# Altium PCB Copy of corePCB.PcbDoc
Units mil, origin at the board's own origin, x right, y up, seen from the top; angles counter-clockwise.
Board outline 6000 x 4000 mil, 4 copper layers (Top Layer, Layer 1, Layer 2, Bottom Layer), stack 23.756 mil thick; 90 components, 166 nets, 637 pads, 15 vias.
Unrouted connection lines stored in the file: 432.
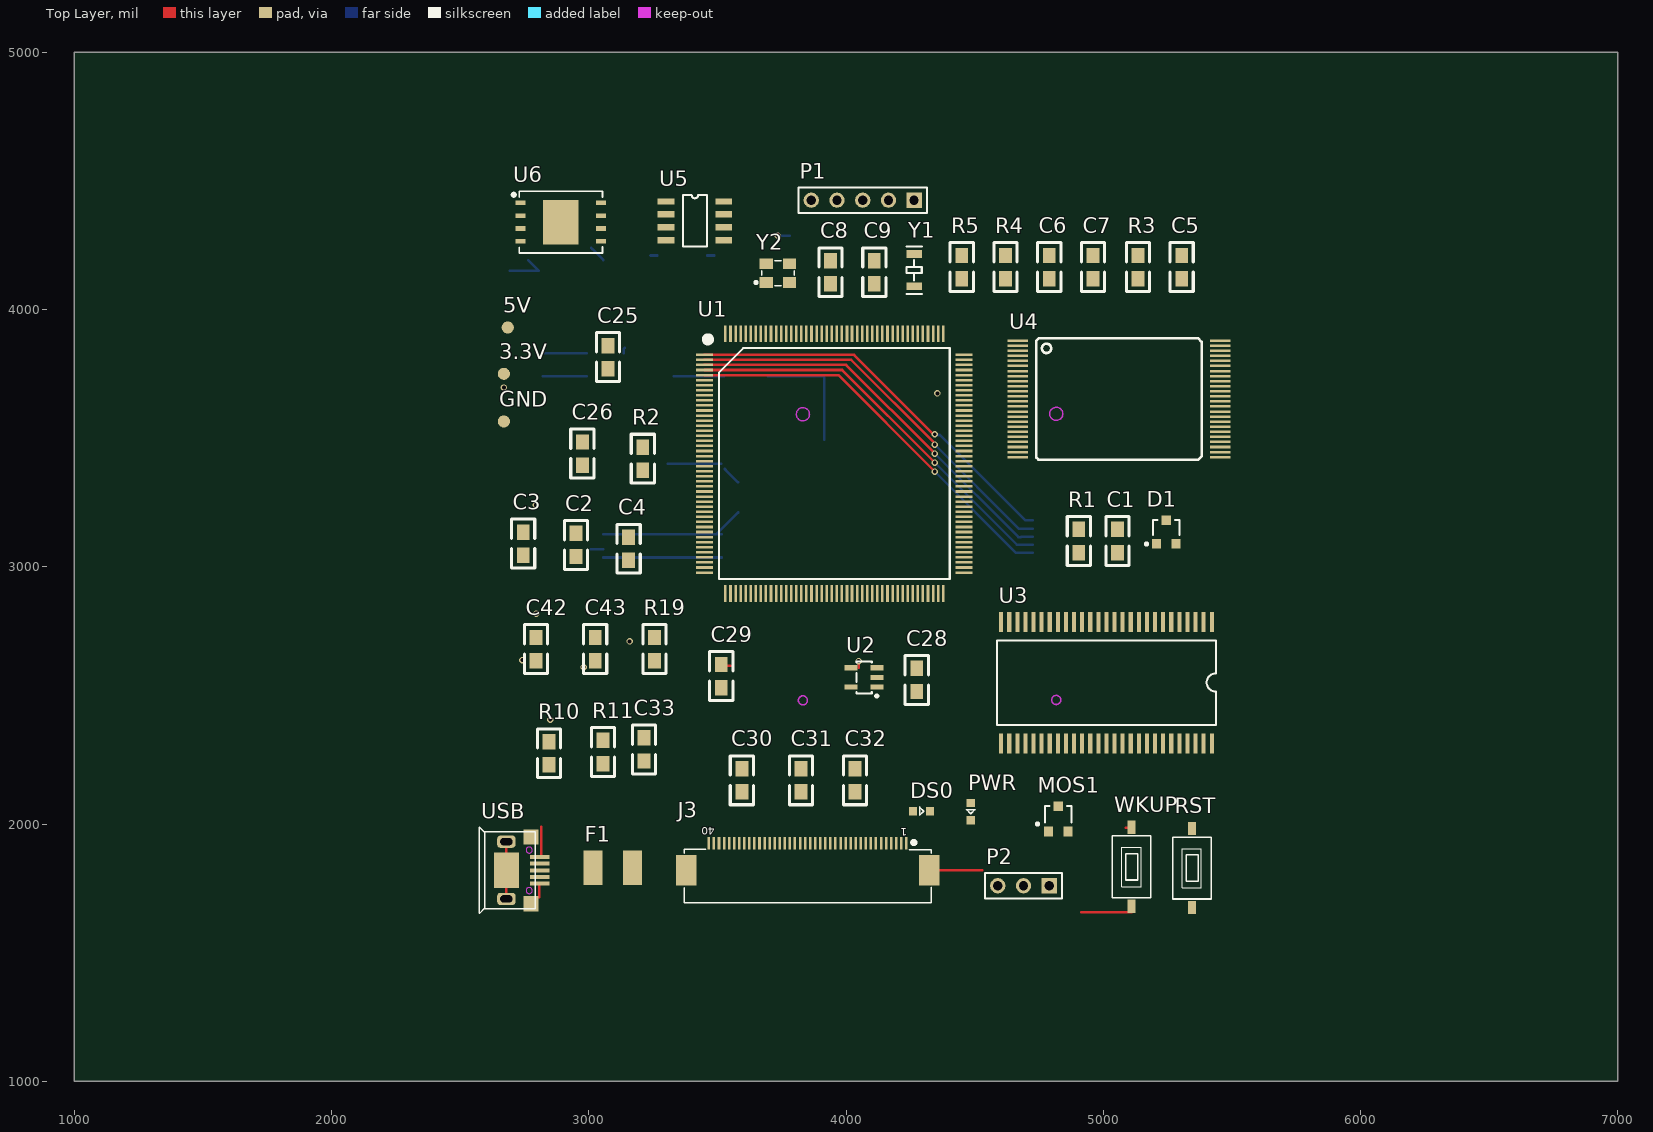
[diagram p0: Top Layer view]
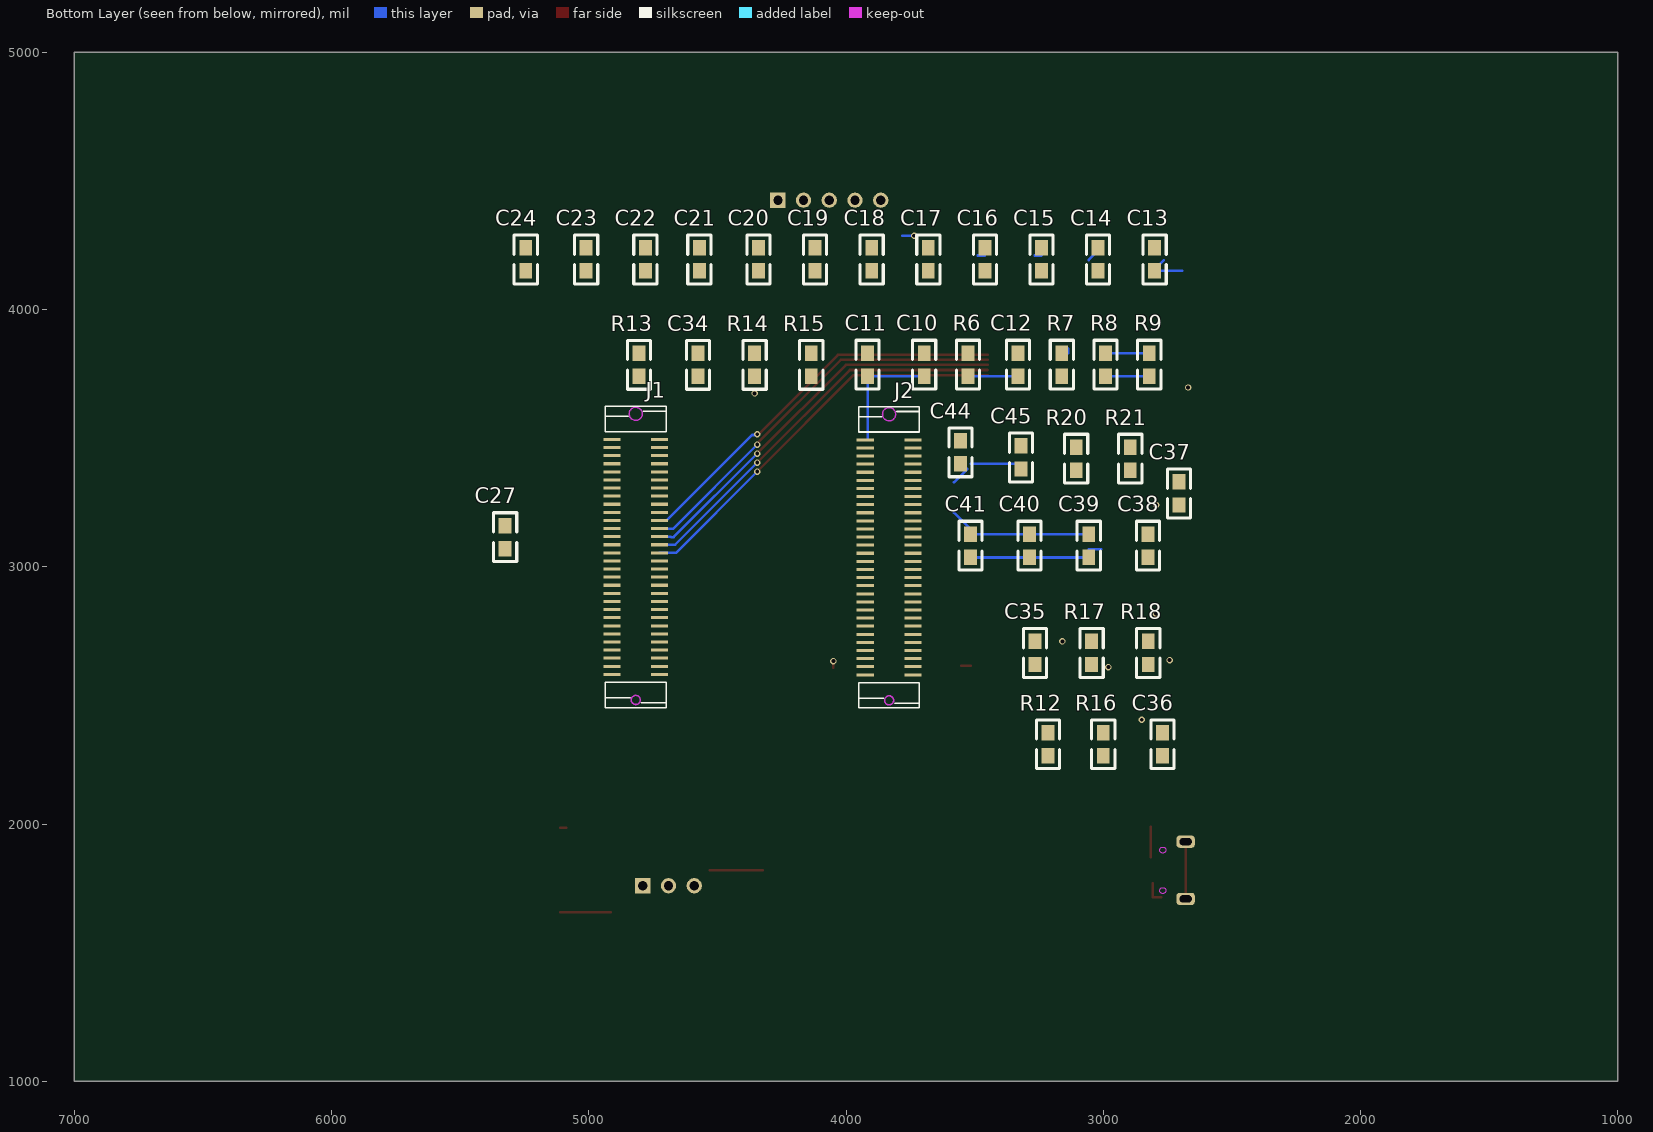
[diagram p1: Bottom Layer view, seen from below]
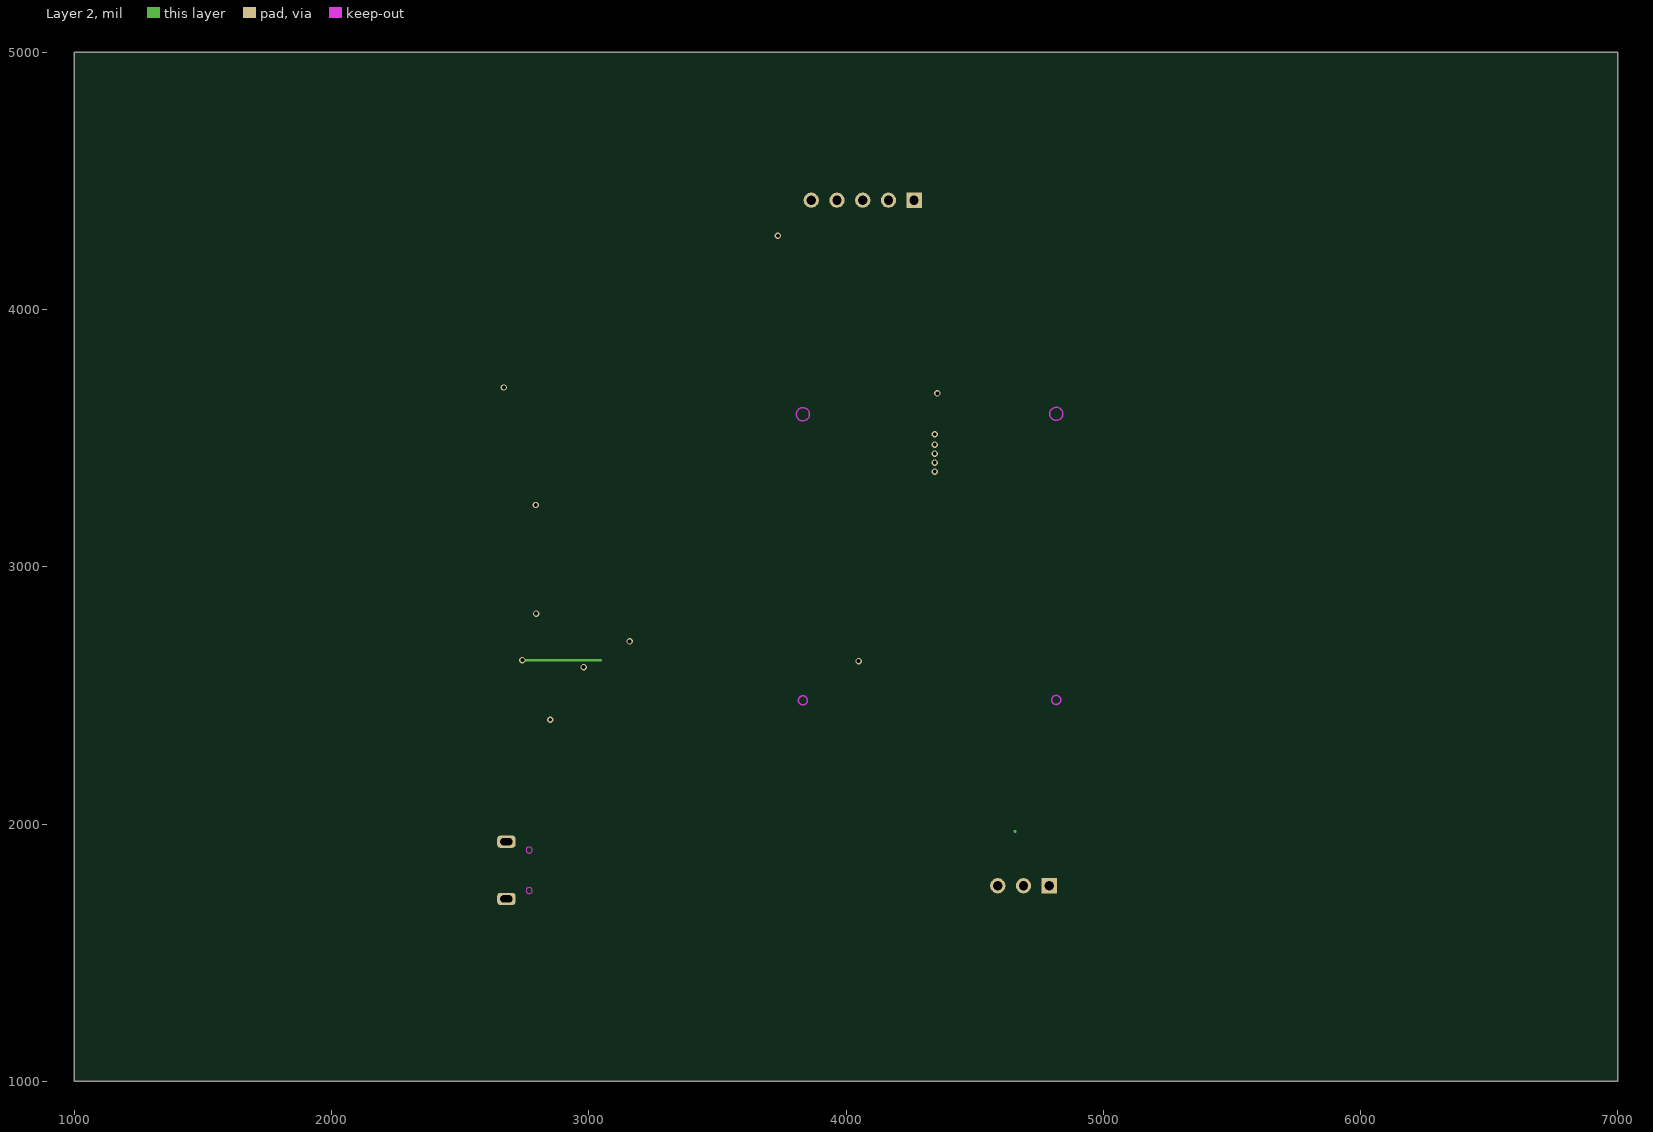
[diagram p2: Layer 2]

## Layer stack, top to bottom
Top Solder: solder mask 0.4, Solder Resist, Dk 3.5
Top Layer: signal copper 1.4
Dielectric 2: prepreg 2.8, PP-006, Dk 4.1
Layer 1: signal copper 1.3779
Dielectric 1: dielectric 12.6, FR-4, Dk 4.8
Layer 2: signal copper 1.3779
Dielectric 3: prepreg 2.8, PP-006, Dk 4.1
Bottom Layer: signal copper 1.4
Bottom Solder: solder mask 0.4, Solder Resist, Dk 3.5

## Board outline
1000,1000 7000,1000 7000,5000 1000,5000

## Design rules (kind name [scope] priority, off if disabled: settings)
Clearance [All] p1: gap=6 ignorepadtopadclearanceinfootprint=TRUE except(0: Arc-Hole Track-Hole SMDPad-Hole THPad-Hole Via-Hole Fill-Hole Poly-Hole Region-Hole Text-Hole)
ComponentClearance [All] p1 off: gap=10 collisioncheckmode=3 verticalgap=10 showdistances=FALSE
DiffPairsRouting [All] p1 off: maxlimit=10 minlimit=10 mostfreqgap=10 toplayer_minwidth=15 toplayer_maxwidth=15 toplayer_prefwidth=15 midlayer1_minwidth=15 midlayer1_maxwidth=15 midlayer1_prefwidth=15 midlayer2_minwidth=15 midlayer2_maxwidth=15 midlayer2_prefwidth=15 bottomlayer_minwidth=15 bottomlayer_maxwidth=15 bottomlayer_prefwidth=15 maxuncoupledlength=500
FanoutControl Fanout_BGA [IsBGA] p1 off: bgadir=Out bgaviamode=Centered fanoutstyle=Auto fanoutdirection=Alternating viagrid=1 // Fanout_BGA (Default Rule)
FanoutControl Fanout_LCC [IsLCC] p2 off: bgadir=Out bgaviamode=Centered fanoutstyle=Auto fanoutdirection=Alternating viagrid=1 // Fanout_LCC (Default Rule)
FanoutControl Fanout_SOIC [IsSOIC] p3 off: bgadir=Out bgaviamode=Centered fanoutstyle=Auto fanoutdirection=Alternating viagrid=1 // Fanout_SOIC (Default Rule)
FanoutControl Fanout_Small [(CompPinCount < 5)] p4 off: bgadir=Out bgaviamode=Centered fanoutstyle=Auto fanoutdirection=OutThenIn viagrid=1 // Fanout_Small (Default Rule)
FanoutControl Fanout_Default [All] p5 off: bgadir=Out bgaviamode=Centered fanoutstyle=Auto fanoutdirection=Alternating viagrid=1 // Fanout_Default (Default Rule)
Height [All] p1 off: minheight=0 maxheight=1000 prefheight=500
PolygonConnect [All] p1: connectstyle=Relief reliefconductorwidth=10 reliefentries=4 polygonreliefangle="90 Angle" airgapwidth=10
RoutingCorners [All] p1 off: cornerstyle=45-Degree minsetback=100 maxsetback=100
RoutingLayers [All] p1 off: top layer_v5=TRUE mid layer 1_v5=TRUE mid layer 2_v5=TRUE bottom layer_v5=TRUE
RoutingPriority [All] p1 off: routingpriority=0
RoutingTopology [All] p1 off: topology=Shortest
RoutingVias [All] p1: holewidth=15 width=25 viastyle="Through Hole" minholewidth=15 minwidth=25 maxholewidth=15 maxwidth=25
SMDToCorner [All] p1: distance=0
SolderMaskExpansion [All] p1: expansion=4
Width [All] p1 off: maxlimit=10 minlimit=10 preferedwidth=10
18 further rules are at their usual default settings.

## Classes and differential pairs
component class stm: C1 C2 C3 C4 C5 C6 C7 C8 C9 C10 C11 C12 C13 C14 C15 C16 C17 C18 C19 C20 C21 C22 C23 C24 C25 C26 C27 D1 J1 J2 P1 R1 R2 R3 R4 R5 R6 R7 R8 R9 RST U1 Y1 Y2
component class mem: C35 C36 C37 C38 C39 C40 C41 C42 C43 C44 C45 R16 R17 R18 R19 R20 R21 U3 U4 U5 U6
component class circuit: 3.3V 5V C28 C29 C30 C31 C32 C33 C34 DS0 F1 GND J3 MOS1 P2 PWR R10 R11 R12 R13 R14 R15 U2 USB WKUP

## Components (designator, comment, footprint, x,y, rotation, side; value= is the part's Value field where it differs from the comment)
3.3V "TEST POINT" TP-1.5 2670,3750 r90 top
5V "TEST POINT" TP-1.5 2685,3930 r0 top
C1 "104" 0805 5055,3055 r90 top
C2 "104" 0805 2950,3040 r90 top
C3 "225" 0805 2745,3045 r90 top
C4 "225" 0805 3155,3025 r90 top
C5 "225" 0805 5305,4120 r90 top
C6 "10uF" 0805 4790,4120 r90 top
C7 "104" 0805 4960,4120 r90 top
C8 "6pF" 0805 3940,4100 r90 top
C9 "6pF" 0805 4110,4100 r90 top
C10 "22pF" 0805 3696.13,3740.59 r90 bottom
C11 "22pF" 0805 3916.13,3740.59 r90 bottom
C12 "104" 0805 3331.13,3740.59 r90 bottom
C13 "104" 0805 2800.13,4150 r90 bottom
C14 "104" 0805 3020.13,4150 r90 bottom
C15 "104" 0805 3240.13,4150 r90 bottom
C16 "104" 0805 3460.13,4150 r90 bottom
C17 "104" 0805 3680.13,4150 r90 bottom
C18 "104" 0805 3900.13,4150 r90 bottom
C19 "104" 0805 4120.13,4150 r90 bottom
C20 "104" 0805 4340.13,4150 r90 bottom
C21 "104" 0805 4570.13,4150 r90 bottom
C22 "104" 0805 4780.13,4150 r90 bottom
C23 "104" 0805 5010.13,4150 r90 bottom
C24 "104" 0805 5245.13,4150 r90 bottom
C25 "104" 0805 3074.94,3770 r90 top
C26 "104" 0805 2975,3395 r90 top
C27 "104" 0805 5325,3070 r90 bottom
C28 "104" 0805 4274.94,2515 r90 top
C29 "10uF" 0805 3514.94,2530 r90 top
C30 "103" 0805 3595,2125 r90 top
C31 "104" 0805 3825,2125 r90 top
C32 "10uF" 0805 4035,2125 r90 top
C33 "104" 0805 3214.94,2245 r90 top
C34 "104" 0805 4575.13,3740 r90 bottom
C35 "104" 0805 3265.13,2620 r90 bottom
C36 "104" 0805 2770.13,2265 r90 bottom
C37 "104" 0805 2705.06,3240 r90 bottom
C38 "104" 0805 2826.45,3036.93 r90 bottom
C39 "104" 0805 3056.45,3036.93 r90 bottom
C40 "104" 0805 3286.45,3036.93 r90 bottom
C41 "104" 0805 3516.45,3036.93 r90 bottom
C42 "104" 0805 2795,2635 r90 top
C43 "104" 0805 3025,2635 r90 top
C44 "104" 0805 3555.13,3400 r90 bottom
C45 "104" 0805 3320.13,3380 r90 bottom
D1 "BAT54C" SOT-23 5245,3130 r0 top
DS0 "LED" SMDLED-0603 4260,2050 r0 top
F1 "1812L075PR" *1812 3093.23,1830 r0 top
GND "TEST POINT" TP-1.5 2670,3565 r90 top
J1 "3710M060046G3FT01" 3710F060046G3FT01 4910,2581.61 r0 bottom
J2 "3710M060046G3FT01" 3710F060046G3FT01 3925.04,2580.04 r0 bottom
J3 "RGBLCD" FPC-TOP40 4234.65,1929 r180 top
MOS1 "SI2301" SO-G3/C2.5 4825,2020 r0 top
P1 "SWD" HDR1X5 4265,4425 r180 top
P2 "USART1" HDR1X3 4790,1760 r180 top
PWR "LED" SMDLED-0603 4485,2081.93 r270 top
R1 "10K" 0805 4905,3055 r90 top
R2 "10R" 0805 3209.94,3375 r90 top
R3 "10R" 0805 5135,4120 r90 top
R4 "0R" 0805 4620,4120 r90 top
R5 "0R" 0805 4450,4120 r90 top
R6 "10K" 0805 3526.13,3740.59 r90 bottom
R7 "100K" 0805 3161.13,3740.59 r90 bottom
R8 "0R" 0805 2991.13,3740.59 r90 bottom
R9 "0R" 0805 2821.13,3740.59 r90 bottom
R10 "1K" 0805 2844.94,2230 r90 top
R11 "10R" 0805 3055,2235 r90 top
R12 "10R" 0805 3215.06,2265 r90 bottom
R13 "10R" 0805 4805.13,3740 r90 bottom
R14 "100K" 0805 4355.13,3740 r90 bottom
R15 "1K" 0805 4135.13,3740 r90 bottom
R16 "0R" 0805 3000.13,2265 r90 bottom
R17 "10K" 0805 3045.13,2620 r90 bottom
R18 "10K" 0805 2825.13,2620 r90 bottom
R19 "10K" 0805 3255,2635 r90 top
R20 "4.7K" 0805 3105.13,3375 r90 bottom
R21 "4.7K" 0805 2895.13,3375 r90 bottom
RST "KEY_M" KEY_SOP3625 5345,1675 r90 top
U1 "STM32F767IGT6" LQFP176 3450,3824.02 r0 top
U2 "CAT6219-330TD" SOT-23-5 4120,2532.6 r180 top
U3 "W9825G6KH" TSOP54 5421.97,2785 r270 top
U4 "MT29F4G08" TSOP48 4667.6,3879.01 r0 top
U5 "24C02" SOP-8 3300.59,4420 r0 top
U6 "W25Q256" WSON8 2891.5,4340 r0 top
USB "USB-AB" "USB_AB - 5S - B" 2595,1820 r90 top
WKUP "KEY_UP" KEY_SOP3625 5110,1680 r90 top
Y1 "32.768KHz" XTAL3215 4265,4090 r90 top
Y2 "25Mhz" XTAL3225 3690,4105 r0 top

## Footprints (in the part's own frame and the unit in brackets; to place one, negate y for a bottom-side part, rotate by r counter-clockwise, add the part's x,y. Pads: shape width x height; smd on the part's side, far side on the other; paste and mask are expansions set on the pad)
0805 [mil]
  rect 60x50 smd: 1(0,-0.06) 2(90,-0.06)
  silkscreen extent -50,-45 140,45
3710F060046G3FT01 [mm]
  rect 1.7x0.3 smd: 1(-4.7,0) 2(-4.7,-0.8) 3(-4.7,-1.6) 4(-4.7,-2.4) 5(-4.7,-3.2) 6(-4.7,-4) 7(-4.7,-4.8) 8(-4.7,-5.6) 9(-4.7,-6.4) 10(-4.7,-7.2) 11(-4.7,-8) 12(-4.7,-8.8) 13(-4.7,-9.6) 14(-4.7,-10.4) 15(-4.7,-11.2) 16(-4.7,-12) 17(-4.7,-12.8) 18(-4.7,-13.6) 19(-4.7,-14.4) 20(-4.7,-15.2) 21(-4.7,-16) 22(-4.7,-16.8) 23(-4.7,-17.6) 24(-4.7,-18.4) 25(-4.7,-19.2) 26(-4.7,-20) 27(-4.7,-20.8) 28(-4.7,-21.6) 29(-4.7,-22.4) 30(-4.7,-23.2) 31(0,-23.2) 32(0,-22.4) 33(0,-21.6) 34(0,-20.8) 35(0,-20) 36(0,-19.2) 37(0,-18.4) 38(0,-17.6) 39(0,-16.8) 40(0,-16) 41(0,-15.2) 42(0,-14.4) 43(0,-13.6) 44(0,-12.8) 45(0,-12) 46(0,-11.2) 47(0,-10.4) 48(0,-9.6) 49(0,-8.8) 50(0,-8) 51(0,-7.2) 52(0,-6.4) 53(0,-5.6) 54(0,-4.8) 55(0,-4) 56(0,-3.2) 57(0,-2.4) 58(0,-1.6) 59(0,-0.8) 60(0,0)
  Keep-Out Layer circle w0.152: c-2.35,-25.725 r0.65
  Keep-Out Layer circle w0.152: c-2.35,2.525 r0.45
  silkscreen extent -5.35,-26.48 0.65,3.27
*1812 [mm]
  rect 1.9x3.4 smd: 1(-1.95,0) 2(1.95,0)
FPC-TOP40 [mm]
  rect 0.25x1.2 smd: 1(0,0.102) 2(0.5,0.102) 3(1,0.102) 4(1.5,0.102) 5(2,0.102) 6(2.5,0.102) 7(3,0.102) 8(3.5,0.102) 9(4,0.102) 10(4.5,0.102) 11(5,0.102) 12(5.5,0.102) 13(6,0.102) 14(6.5,0.102) 15(7,0.102) 16(7.5,0.102) 17(8,0.102) 18(8.5,0.102) 19(9,0.102) 20(9.5,0.102) 21(10,0.102) 22(10.5,0.102) 23(11,0.102) 24(11.5,0.102) 25(12,0.102) 26(12.5,0.102) 27(13,0.102) 28(13.5,0.102) 29(14,0.102) 30(14.5,0.102) 31(15,0.102) 32(15.5,0.102) 33(16,0.102) 34(16.5,0.102) 35(17,0.102) 36(17.5,0.102) 37(18,0.102) 38(18.5,0.102) 39(19,0.102) 40(19.5,0.102)
  rect 2x3 smd: A(-2.25,2.754) B(21.725,2.754)
  silkscreen extent -2.45,-0.15 21.92,5.97
HDR1X3 [mm]
  rect 1.5x1.5 hole 0.9: 1(0,0)
  round 1.5 hole 0.9: 2(2.54,0) 3(5.08,0)
  silkscreen extent -1.27,-1.27 6.35,1.27
HDR1X5 [mm]
  rect 1.5x1.5 hole 0.9: 1(0,0)
  round 1.5 hole 0.9: 2(2.54,0) 3(5.08,0) 4(7.62,0) 5(10.16,0)
  silkscreen extent -1.27,-1.27 11.43,1.27
KEY_SOP3625 [mm]
  rect 1.3x0.8 smd: 1(0,0) 2(7.8,0)
  silkscreen extent 0.85,-1.9 6.95,1.9
LQFP176 [mm]
  rect 1.65x0.254 smd: 1(0,0) 2(0,-0.5) 3(0,-1) 4(0,-1.5) 5(0,-2) 6(0,-2.5) 7(0,-3) 8(0,-3.5) 9(0,-4) 10(0,-4.5) 11(0,-5) 12(0,-5.5) 13(0,-6) 14(0,-6.5) 15(0,-7) 16(0,-7.5) 17(0,-8) 18(0,-8.5) 19(0,-9) 20(0,-9.5) 21(0,-10) 22(0,-10.5) 23(0,-11) 24(0,-11.5) 25(0,-12) 26(0,-12.5) 27(0,-13) 28(0,-13.5) 29(0,-14) 30(0,-14.5) 31(0,-15) 32(0,-15.5) 33(0,-16) 34(0,-16.5) 35(0,-17) 36(0,-17.5) 37(0,-18) 38(0,-18.5) 39(0,-19) 40(0,-19.5) 41(0,-20) 42(0,-20.5) 43(0,-21) 44(0,-21.5) 89(25.631,-21.5) 90(25.631,-21) 91(25.631,-20.5) 92(25.631,-20) 93(25.631,-19.5) 94(25.631,-19) 95(25.631,-18.5) 96(25.631,-18) 97(25.631,-17.5) 98(25.631,-17) 99(25.631,-16.5) 100(25.631,-16) 101(25.631,-15.5) 102(25.631,-15) 103(25.631,-14.5) 104(25.631,-14) 105(25.631,-13.5) 106(25.631,-13) 107(25.631,-12.5) 108(25.631,-12) 109(25.631,-11.5) 110(25.631,-11) 111(25.631,-10.5) 112(25.631,-10) 113(25.631,-9.5) 114(25.631,-9) 115(25.631,-8.5) 116(25.631,-8) 117(25.631,-7.5) 118(25.631,-7) 119(25.631,-6.5) 120(25.631,-6) 121(25.631,-5.5) 122(25.631,-5) 123(25.631,-4.5) 124(25.631,-4) 125(25.631,-3.5) 126(25.631,-3) 127(25.631,-2.5) 128(25.631,-2) 129(25.631,-1.5) 130(25.631,-1) 131(25.631,-0.5) 132(25.631,0)
  rect 0.254x1.65 smd: 45(2.065,-23.566) 46(2.566,-23.566) 47(3.066,-23.566) 48(3.565,-23.566) 49(4.066,-23.566) 50(4.565,-23.566) 51(5.066,-23.566) 52(5.565,-23.566) 53(6.066,-23.566) 54(6.565,-23.566) 55(7.066,-23.566) 56(7.565,-23.566) 57(8.066,-23.566) 58(8.565,-23.566) 59(9.066,-23.566) 60(9.565,-23.566) 61(10.066,-23.566) 62(10.565,-23.566) 63(11.066,-23.566) 64(11.565,-23.566) 65(12.066,-23.566) 66(12.565,-23.566) 67(13.066,-23.566) 68(13.565,-23.566) 69(14.066,-23.566) 70(14.565,-23.566) 71(15.066,-23.566) 72(15.566,-23.566) 73(16.066,-23.566) 74(16.566,-23.566) 75(17.065,-23.566) 76(17.566,-23.566) 77(18.065,-23.566) 78(18.566,-23.566) 79(19.065,-23.566) 80(19.566,-23.566) 81(20.065,-23.566) 82(20.566,-23.566) 83(21.065,-23.566) 84(21.566,-23.566) 85(22.065,-23.566) 86(22.566,-23.566) 87(23.065,-23.566) 88(23.566,-23.566) 133(23.566,2.065) 134(23.065,2.065) 135(22.566,2.065) 136(22.065,2.065) 137(21.566,2.065) 138(21.065,2.065) 139(20.566,2.065) 140(20.065,2.065) 141(19.566,2.065) 142(19.065,2.065) 143(18.566,2.065) 144(18.065,2.065) 145(17.566,2.065) 146(17.065,2.065) 147(16.566,2.065) 148(16.066,2.065) 149(15.566,2.065) 150(15.066,2.065) 151(14.565,2.065) 152(14.066,2.065) 153(13.565,2.065) 154(13.066,2.065) 155(12.565,2.065) 156(12.066,2.065) 157(11.565,2.065) 158(11.066,2.065) 159(10.565,2.065) 160(10.066,2.065) 161(9.565,2.065) 162(9.066,2.065) 163(8.565,2.065) 164(8.066,2.065) 165(7.565,2.065) 166(7.066,2.065) 167(6.565,2.065) 168(6.066,2.065) 169(5.565,2.065) 170(5.066,2.065) 171(4.565,2.065) 172(4.066,2.065) 173(3.565,2.065) 174(3.066,2.065) 175(2.566,2.065) 176(2.065,2.065)
  silkscreen extent 0.04,-22.15 24.22,1.82
SMDLED-0603 [mil]
  rect 32x32 smd: 1(0,0) 2(66.93,0)
  silkscreen extent 26,-17 42,17
SO-G3/C2.5 [mm]
  rect 0.9x0.95 smd: 1(-0.95,-1.25) 2(0.95,-1.25) 3(0,1.25)
  silkscreen extent -2.15,-0.63 1.3,1.25
SOP-8 [mil]
  rect 65x25 smd: 1(0,0) 2(0,-50) 3(0,-100) 4(0,-150) 5(224.41,-150) 6(224.41,-100) 7(224.41,-50) 8(224.41,0)
  silkscreen extent 65,-175 159,25
SOT-23 [mm]
  rect 0.9x0.95 smd: 1(-0.95,-1.048) 2(0.95,-1.048) 3(0,1.302)
  silkscreen extent -2.07,-1.17 1.3,1.3
SOT-23-5 [mil]
  rect 50x20 smd: 1(0,0) 2(0,-37.4) 3(0,-74.8) 4(100,-74.8) 5(100,0)
  silkscreen extent 0,-99 80,35
TP-1.5 [mm]
  round 1.2 smd: 1(0,0)
TSOP48 [mm]
  rect 2x0.25 smd: 1(0,0) 2(0,-0.5) 3(0,-1) 4(0,-1.5) 5(0,-2) 6(0,-2.5) 7(0,-3) 8(0,-3.5) 9(0,-4) 10(0,-4.5) 11(0,-5) 12(0,-5.5) 13(0,-6) 14(0,-6.5) 15(0,-7) 16(0,-7.5) 17(0,-8) 18(0,-8.5) 19(0,-9) 20(0,-9.5) 21(0,-10) 22(0,-10.5) 23(0,-11) 24(0,-11.5) 25(20,-11.5) 26(20,-11) 27(20,-10.5) 28(20,-10) 29(20,-9.5) 30(20,-9) 31(20,-8.5) 32(20,-8) 33(20,-7.5) 34(20,-7) 35(20,-6.5) 36(20,-6) 37(20,-5.5) 38(20,-5) 39(20,-4.5) 40(20,-4) 41(20,-3.5) 42(20,-3) 43(20,-2.5) 44(20,-2) 45(20,-1.5) 46(20,-1) 47(20,-0.5) 48(20,0)
  silkscreen extent 1.83,-11.75 18.17,0.25
TSOP54 [mm]
  rect 2x0.4 smd: 1(0,0) 2(0,-0.8) 3(0,-1.6) 4(0,-2.4) 5(0,-3.2) 6(0,-4) 7(0,-4.8) 8(0,-5.6) 9(0,-6.4) 10(0,-7.2) 11(0,-8) 12(0,-8.8) 13(0,-9.6) 14(0,-10.4) 15(0,-11.2) 16(0,-12) 17(0,-12.8) 18(0,-13.6) 19(0,-14.4) 20(0,-15.2) 21(0,-16) 22(0,-16.8) 23(0,-17.6) 24(0,-18.4) 25(0,-19.2) 26(0,-20) 27(0,-20.8) 28(12,-20.8) 29(12,-20) 30(12,-19.2) 31(12,-18.4) 32(12,-17.6) 33(12,-16.8) 34(12,-16) 35(12,-15.2) 36(12,-14.4) 37(12,-13.6) 38(12,-12.8) 39(12,-12) 40(12,-11.2) 41(12,-10.4) 42(12,-9.6) 43(12,-8.8) 44(12,-8) 45(12,-7.2) 46(12,-6.4) 47(12,-5.6) 48(12,-4.8) 49(12,-4) 50(12,-3.2) 51(12,-2.4) 52(12,-1.6) 53(12,-0.8) 54(12,0)
  silkscreen extent 1.83,-21.2 10.16,0.4
"USB_AB - 5S - B" [mm]
  rect 0.4x1.9 smd: 1(1.3,-5.436) 2(0.65,-5.436) 3(0,-5.436) 4(-0.65,-5.436) 5(-1.3,-5.436)
  rrect50% 1.2x1.8 hole 0.7 slot 1.2 at 90 deg: 6(2.825,-2.15) 7(-2.825,-2.15)
  rect 1.5x1.5 smd: 8(-3.302,-4.572) 9(3.302,-4.572)
  rect 3.5x2.5 smd: 9(0,-2.159)
  Keep-Out Layer circle w0.102: c2,-4.4 r0.3
  Keep-Out Layer circle w0.102: c-2,-4.4 r0.3
  silkscreen extent -4.26,-5 4.26,0.51
WSON8 [mm]
  rect 1x0.45 smd: 1(-3.975,1.905) 2(-3.975,0.635) 3(-3.975,-0.635) 4(-3.975,-1.905) 5(3.975,-1.905) 6(3.975,-0.635) 7(3.975,0.635) 8(3.975,1.905)
  rect 3.5x4.4 smd: 9(0,0)
  silkscreen extent -4.8,-3.05 4.1,3.05
XTAL3215 [mm]
  rect 0.75x1.5 smd: 1(0,0) 2(3.2,0)
  silkscreen extent -0.74,-0.75 3.94,0.75
XTAL3225 [mm]
  rect 1.3x1.05 smd: 1(0,0) 2(2.3,0) 3(2.3,1.85) 4(0,1.85)
  silkscreen extent -1.14,-0.33 2.74,2.17

## Part data
3.3V 5V GND: library part TEST-POINT, "测试点"
C1 C2 C3 C4 C5 C6 C7 C8 C9 C10 C11 C12 C13 C14 C15 C16 C17 C18 C19 C20 C21 C22 C23 C24 C25 C26 C27 C28 C29 C30 C31 C32 C33 C34 C35 C36 C37 C38 C39 C40 C41 C42 C43 C44 C45: library part C
D1: "双肖特基二极管"
F1: "PTC Resettable Fuse 0.75A_hold_ 1.5A_trip_ 13.2VDC 100A 0.8W 0.2s 0.1Ohm SMD Solder Pad 1812 T/R", Package="1812 Littelfuse", Availability=Unavailable, MF="Littelfuse Inc.", MP=1812L075PR, Price=None, SnapEDA_Link=https://www.snapeda.com/parts/1812L075PR/Littelfuse%20Inc./view-part/?ref=snap
J1 J2: library part 3710F, "3710F060046G3FT01"
J3: library part FPC-40, "FPC-40P-0.5mm"
MOS1: library part MOS-P, "IRLML6401/SI2301"
P1: library part "Header 5", "Header, 5-Pin", LatestRevisionDate=17-Jul-2002, LatestRevisionNote="Re-released for DXP Platform.", Publisher="Altium Limited"
P2: library part "Header 3", "Header, 3-Pin", LatestRevisionDate=17-Jul-2002, LatestRevisionNote="Re-released for DXP Platform.", Publisher="Altium Limited"
R1 R2 R3 R4 R5 R6 R7 R8 R9 R10 R11 R12 R13 R14 R15 R16 R17 R18 R19 R20 R21: library part R
U2: "3.3V 500mA LDO"
U3: library part IS42S16160B, "32MB SDRAM"
U4: library part K9F2G08U0C, "256MB NAND FLASH"
U5: library part 24C256, "EEPROM"
U6: library part W25Q128, "W25Q128"
USB: "MicroUSB"
WKUP: library part KEY_M
Y1: library part XTAL, "普通晶振"
Y2: library part XTAL_3225, "3225贴片无源晶振"

## Via types
v1: diameter 25, hole 15, Top Layer to Bottom Layer, 15 vias

## Nets (pads, with @x,y where several pads share a name; then routed paths per layer and width w, separated by ;. In a path a pad name is that pad's centre, name@x,y a point inside that pad or via, vN(x,y) a via of type N, cw(c..) or ccw(c..) an arc to the next point about the centre after c; other vN are vias at no path point)
1WIRE_DQ: J2.4 U1.92
BOOT0: J1.31 R7.1 U1.166
DCMI_D0: J2.16 U1.115
DCMI_D1: J2.17 U1.116
DCMI_D2: J2.18 U1.117
DCMI_D3: J2.19 U1.118
DCMI_D4: J1.39 U1.140
DCMI_D5: J1.36 U1.145
DCMI_D6: J1.26 U1.167
DCMI_D7: J1.27 U1.168
DCMI_HREF: J2.3 U1.85
DCMI_PLCK: J1.47 U1.52
DCMI_RESET: J1.25 J1.41 U1.138 U1.165
DCMI_SCL: J1.22 U1.162
DCMI_SDA: J1.21 U1.161
DCMI_XCLK: J2.20 U1.119
ETH_MDC: J1.9 U1.33
ETH_MDIO: J1.4 U1.42
FMC_A0: U1.16 U3.23
FMC_A1: U1.17 U3.24
FMC_A2: U1.18 U3.25
FMC_A3: U1.19 U3.26
FMC_A4: U1.20 U3.29
FMC_A5: U1.21 U3.30
FMC_A6: U1.60 U3.31
FMC_A7: U1.63 U3.32
FMC_A8: U1.64 U3.33
FMC_A9: U1.65 U3.34
FMC_A10: U1.66 U3.22
FMC_A11: U1.67 U3.35
FMC_A12: U1.106 U3.36
FMC_A16_CLE: J2.23 U1.99 U4.16
FMC_A17_ALE: J2.21 U1.100 U4.17
FMC_A18: J2.14 U1.101
FMC_BA0: U1.108 U3.20
FMC_BA1: U1.109 U3.21
FMC_D0: J2.45 U1.104 U3.2 U4.29
FMC_D1: J2.46 U1.105 U3.4 U4.30
FMC_D2: J2.47 U1.142 U3.5 U4.31
FMC_D3: J2.48 U1.143 U3.7 U4.32
FMC_D4: J2.49 U1.68 U3.8 U4.41
FMC_D5: J2.50 U1.69 U3.10 U4.42
FMC_D6: J2.51 U1.70 U3.11 U4.43
FMC_D7: J2.52 U1.73 U3.13 U4.44
FMC_D8: J2.53 U1.74 U3.42
FMC_D9: J2.54 U1.75 U3.44
FMC_D10: J2.55 U1.76 U3.45
FMC_D11: J2.56 U1.77 U3.47
FMC_D12: J2.57 U1.78 U3.48
FMC_D13: J2.58 U1.96 U3.50
FMC_D14: J2.59 U1.97 U3.51
FMC_D15: J2.60 U1.98 U3.53
FMC_NBL0: J2.43 U1.169 U3.15
FMC_NBL1: J2.44 U1.170 U3.39
FMC_NCE3: R17.2 U1.152 U4.9
  other v1: 3159,2710
FMC_NE1: J1.35 U1.151
FMC_NOE: J2.26 U1.146 U4.8
FMC_NWAIT: J2.27 U1.150 U4.7
FMC_NWE: J2.22 U1.147 U4.18
FMC_SDCKE0: U1.35 U3.37
FMC_SDCLK: U1.112 U3.38
FMC_SDNCAS: U1.160 U3.17
FMC_SDNE0: R19.2 U1.34 U3.19
FMC_SDNRAS: U1.59 U3.18
FMC_SDNWE: U1.32 U3.16
GBC_KEY: J1.15 U1.13
GBC_LED: J1.45 U1.50
GND: C1.2 C2.1 C3.2 C4.1 C5.2 C6.1 C7.1 C8.1 C9.1 C10.1 C11.1 C12.2 C13.1 C14.1 C15.1 C16.1 C17.1 C18.1 C19.1 C20.1 C21.1 C22.1 C23.1 C24.1 C25.1 C26.1 C27.1 C28.1 C29.1 C30.1 C31.1 C32.1 C33.2 C34.2 C35.1 C36.1 C37.1 C38.1 C39.1 C40.1 C41.1 C42.1 C43.1 C44.2 C45.2 GND.1 J1.1 J1.30 J2.31 J3.3 J3.4 J3.5 J3.11 J3.12 J3.13 J3.20 J3.21 J3.22 J3.23 J3.29 J3.A J3.B P1.1 P2.3 PWR.2 R1.2 R4.2 R7.2 R14.1 RST.2 U1.14 U1.22 U1.37 U1.61 U1.71 U1.90 U1.102 U1.113 U1.126 U1.135 U1.148 U1.158 U2.2 U3.6 U3.12 U3.28 U3.41 U3.46 U3.52 U3.54 U4.13 U4.36 U5.1 U5.2 U5.3 U5.4 U5.7 U6.4 USB.5 USB.6 USB.7 USB.8 USB.9 Y2.2 Y2.4 | length 1678.6
  Top Layer w10: USB.7@2680,1708.78 2680,1820 USB.6@2680,1931.22 ; USB.8@2775,1716 2807,1716 USB.5@2807,1768.82 ; J3.A@4323.23,1821 4529,1821
  Bottom Layer w10: 2692,4150 C13.1 ; 2764,4192 2803.03,4152.97 C13.1@2806,4150 ; 3007.38,3068.62 3056.38,3068.62 ; C39.1@3056.38,3036 3286.38,3036 C41.1@3516.38,3036 ; 3136,3830.59 3136,3847 R7.2@3140.33,3851.33 ; C10.1@3696.07,3740 3916.07,3740 J2.31@3916.07,3493.43
  other v1: 2850,2405 2794,3240 4355.06,3674
IIC_SCL: J1.8 R20.1 U1.45 U5.6
IIC_SDA: J1.7 R21.1 U1.46 U5.5
JTCK: J1.42 P1.2 U1.137
JTMS: J1.43 P1.3 U1.124
KEY0: J1.6 U1.44
KEY1: J1.5 U1.43
KEY2: J1.28 U1.8
LCD_B3: J2.35 J3.24 U1.154
LCD_B4: J2.36 J3.25 U1.173
LCD_B5: J2.37 J3.26 U1.174
LCD_B6: J2.38 J3.27 U1.175
LCD_B7: J2.39 J3.28 U1.176
LCD_BL: J1.23 J3.34 U1.163
LCD_CLK: J3.30 U1.111
LCD_DE: J3.33 U1.28
LCD_G2: J2.30 J3.14 U1.128
LCD_G3: J2.29 J3.15 U1.129
LCD_G4: J2.28 J3.16 U1.130
LCD_G5: J2.34 J3.17 U1.131
LCD_G6: J2.33 J3.18 U1.132
LCD_G7: J2.32 J3.19 U1.133
LCD_HSYNC: J3.31 U1.12
LCD_R3: J2.10 J3.6 U1.86
LCD_R4: J2.11 J3.7 U1.87
LCD_R5: J2.12 J3.8 U1.88
LCD_R6: J2.24 J3.9 U1.89
LCD_R7: J2.15 J3.10 U1.110
LCD_VSYNC: J3.32 U1.11
LED0: DS0.2 J1.57 U1.57
LED1: J1.56 U1.56
NetC1_1: C1.1 D1.3 U1.6
NetC2_2: C2.2 C4.2 R2.1 U1.38
NetC3_1: C3.1 U1.81
NetC5_1: C5.1 U1.125
NetC8_2: C8.2 U1.9 Y1.1
NetC9_2: C9.2 U1.10 Y1.2
NetC10_2: C10.2 U1.30 Y2.1
NetC11_2: C11.2 U1.29 Y2.3 | length 45.6
  Bottom Layer w10: v1(3735,4287) 3780.55,4287
NetC28_2: C28.2 J3.1
NetC29_2: C29.2 F1.2 U2.1 U2.3 | length 36
  Top Layer w10: C29.2@3515,2615 3551,2615
NetC30_2: C30.2 U2.4 | length 25.6
  Top Layer w10: 4049,2607.4 v1(4049,2633)
NetC35_2: C35.2 C36.2 R16.1 U4.12 U4.37
NetDS0_1: DS0.1 R10.2
NetMOS1_1: MOS1.1 R13.2 R14.2 | length 0.3
  Layer 2 w10: 4657,1971 4657.21,1970.79
NetPWR_1: PWR.1 R15.1
NetR1_1: R1.1 U1.48
NetR4_1: R4.1 R5.1 U1.171
NetR11_2: R11.2 USB.3
NetR12_2: R12.2 USB.2
NetR18_1: R18.1 U4.19 | length 305
  Layer 2 w10: v1(2742,2637) 3047,2637
NRF_CE: J2.25 U1.155
NRF_CS: J1.34 U1.153
PA0: J2.42 U1.40 WKUP.1 | length 195
  Top Layer w10: 4915,1657 WKUP.1@5110,1657
PA1: J1.3 U1.41
PA3: J1.44 U1.47
PA5: J1.46 U1.51
PA7: J1.48 U1.53
PA9: J1.51 P2.1 U1.120
PA10: J1.52 P2.2 U1.121
PA11: J1.53 R11.1 U1.122
PA12: J1.54 R12.1 U1.123
PB2: J1.55 U1.58 U6.6
PB6: J1.24 U1.164 U6.1
PB10: J2.2 U1.79
PB11: J2.1 U1.80
PB13: J2.5 U1.93
PB14: J2.6 U1.94
PB15: J2.7 U1.95
PC4: J1.49 U1.54
PC5: J1.50 U1.55
PC10: J1.40 U1.139
PC12: J1.38 U1.141
PD2: J1.37 U1.144
PE2: J1.20 U1.1 | length 1540.3
  Top Layer w10: U1.1 3979.02,3824.02 3979.33,3823.7 4031.36,3823.7 v1@4342.53,3512.53
  Bottom Layer w10: v1(4345,3515) 4347.87,3512.13 4365.31,3512.13 4697.4,3180.04 J1.20
PE3: J1.19 U1.2 | length 1548
  Top Layer w10: U1.2 4020.42,3804.33 v1@4347.38,3477.38
  Bottom Layer w10: v1(4345,3475) 4671.46,3148.54 J1.19
PE4: J1.18 U1.3 | length 1553.3
  Top Layer w10: U1.3 4000.73,3784.65 v1@4345.19,3440.19
  Bottom Layer w10: v1(4345,3440) 4670,3115 4680,3115 4681.14,3116.14 4724.05,3116.14 J1.18
PE5: J1.17 U1.4 | length 1563.5
  Top Layer w10: U1.4 3985.04,3764.96 v1(4345,3405) v1@4350,3400
  Bottom Layer w10: v1(4345,3405) 4664.45,3085.55 J1.17
PE6: J1.16 U1.5 | length 1561.4
  Top Layer w10: U1.5 3970,3745.28 4345,3370.28 v1(4345,3370)
  Bottom Layer w10: v1(4345,3370) 4660.94,3054.06 J1.16
PF6: J1.14 U1.24 U6.7
PF7: J1.13 U1.25 U6.3
PF8: J1.12 U1.26 U6.5
PF9: J1.11 U1.27 U6.2
PG3: J2.13 J3.37 U1.107
PG13: J1.33 U1.156
PG14: J1.32 U1.157
PH6: J2.8 J3.38 U1.83
PH7: J2.9 J3.39 U1.84
PI3: J2.41 J3.36 U1.134
PI8: J2.40 J3.35 U1.7
RESET: C12.1 J1.10 J3.40 P1.5 R6.1 RST.1 U1.31 | length 195
  Bottom Layer w10: C12.1@3331.07,3740 R6.1@3526.07,3740
VBAT: D1.2 J1.29
VCC: R16.2 R20.2 R21.2
VCC3.3: 3.3V.1 C31.2 C32.2 C37.2 C38.2 C39.2 C40.2 C41.2 C42.2 C43.2 C44.1 C45.1 MOS1.2 P1.4 R6.2 R8.1 R9.1 R17.1 R18.2 R19.1 U2.5 U3.1 U3.3 U3.9 U3.14 U3.27 U3.43 U3.49 U5.8 U6.8 WKUP.2 | length 1051.4
  Top Layer w10: 5088,1985 WKUP.2@5110,1985
  Bottom Layer w10: R9.1@2821.07,3740 R8.1@2991.07,3740 ; C39.2@3056.38,3127 C40.2@3286.38,3127 ; C40.2@3286.38,3126 C41.2@3516.38,3126 ; C45.1@3308,3400 3320.06,3400 3515,3400 ; C41.2@3496.93,3126.93 3506.66,3136.66 3581,3211 ; 3529,3380 3532.03,3376.97 3581,3328
  other v1: 2980,2610 2795.06,2818 2670,3697
VCC3.3M: C13.2 C14.2 C15.2 C16.2 C17.2 C18.2 C19.2 C20.2 C21.2 C22.2 C23.2 C24.2 C25.2 C26.2 C27.2 D1.1 R3.2 R5.2 R8.2 R9.2 U1.15 U1.23 U1.36 U1.49 U1.62 U1.72 U1.82 U1.91 U1.103 U1.114 U1.127 U1.136 U1.149 U1.159 U1.172 | length 292.8
  Bottom Layer w10: R9.2@2821.07,3830 R8.2@2991.07,3830 ; C14.2@3009,4240 3014.53,4234.47 3057,4192 ; C15.2@3240.06,4210 3267,4210 ; C16.2@3460.06,4210 3488,4210
VCC5: 5V.1 C33.1 F1.1 J1.58 J1.59 J1.60 J3.2 USB.1 | length 118.8
  Top Layer w10: USB.1@2816,1871.18 2816,1990
VCC_LED: C34.1 MOS1.3 R10.1 R15.2
VDDA: C6.2 C7.2 R2.2 R3.1 U1.39
VREF+: J1.2 R13.1
pads on no net: U3.40 U4.1 U4.2 U4.3 U4.4 U4.5 U4.6 U4.10 U4.11 U4.14 U4.15 U4.20 U4.21 U4.22 U4.23 U4.24 U4.25 U4.26 U4.27 U4.28 U4.33 U4.34 U4.35 U4.38 U4.39 U4.40 U4.45 U4.46 U4.47 U4.48 U6.9 USB.4

## Text inside footprints (layer, text, board x,y; h text height)
J3: Top Overlay "1" at 4238.65,1984 h30 r180; Top Overlay "40" at 3490.65,1988 h30 r180